# Altium PCB Slit_Lamp_PCB.PcbDoc
Units mm, origin at the board's own origin, x right, y up, seen from the top; angles counter-clockwise.
Board outline 40 x 62 mm, 2 copper layers (Top, Bottom); 23 components, 24 nets, 117 pads, 0 vias.
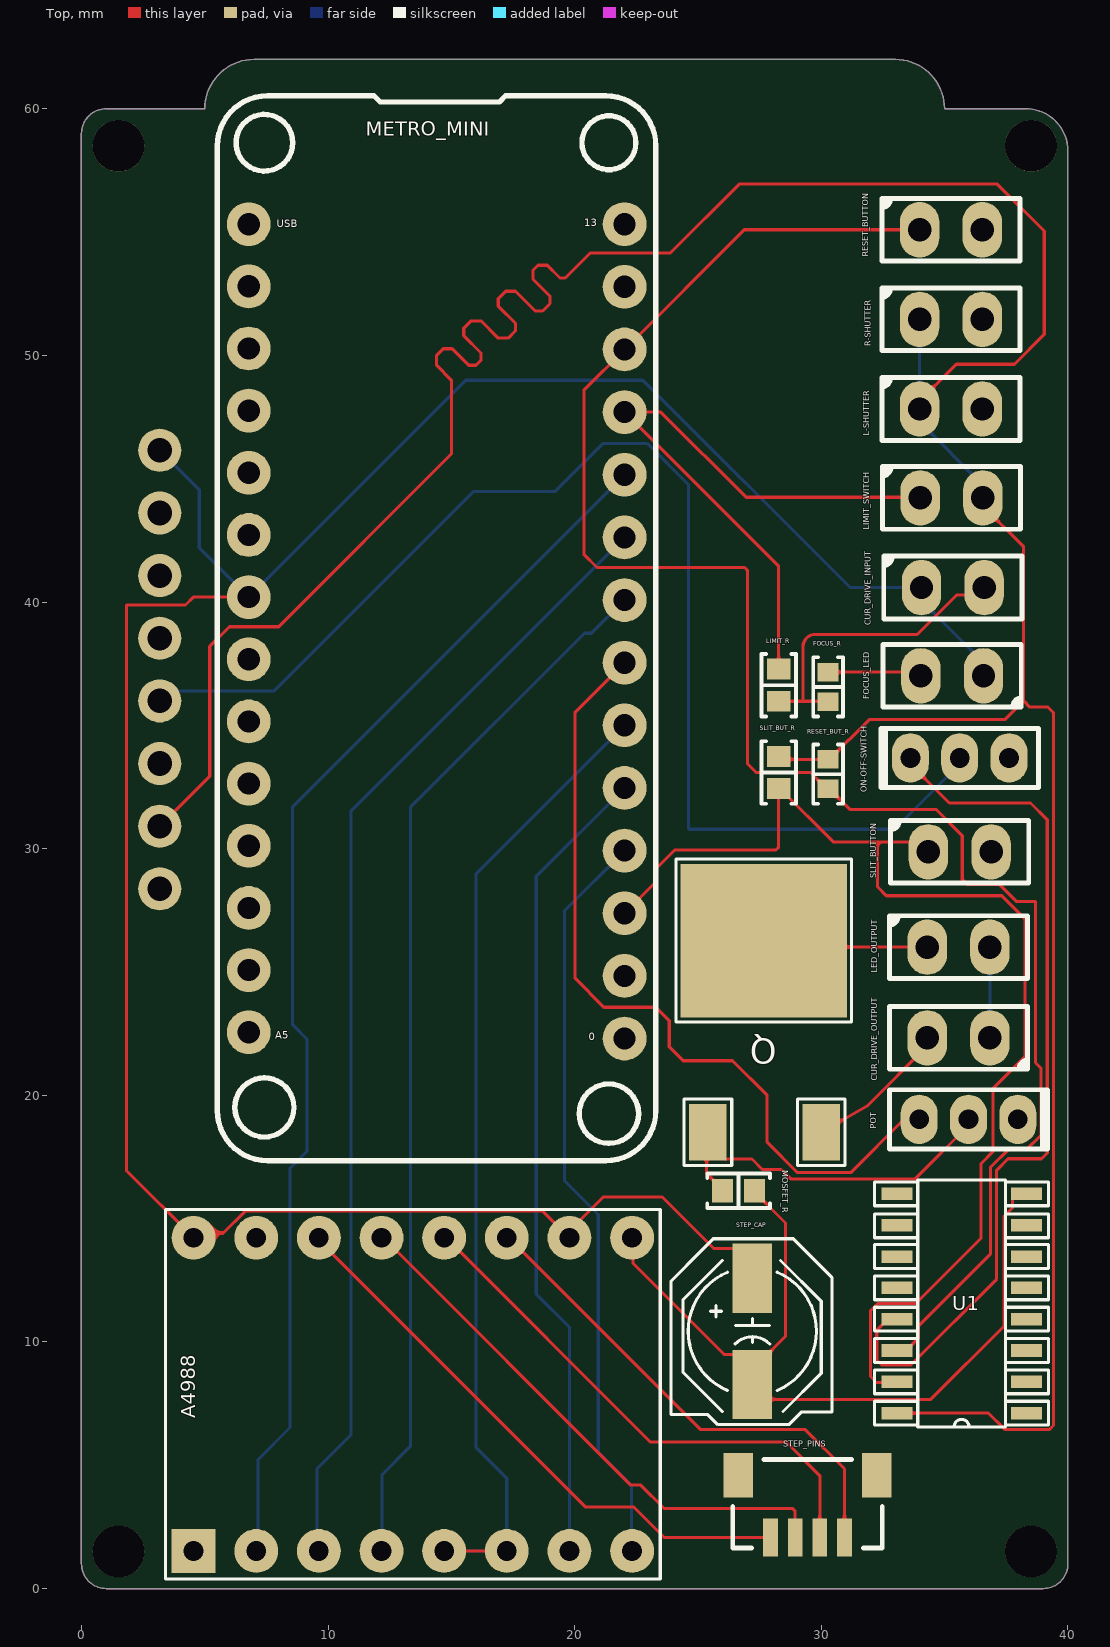
[diagram p0: Top view]
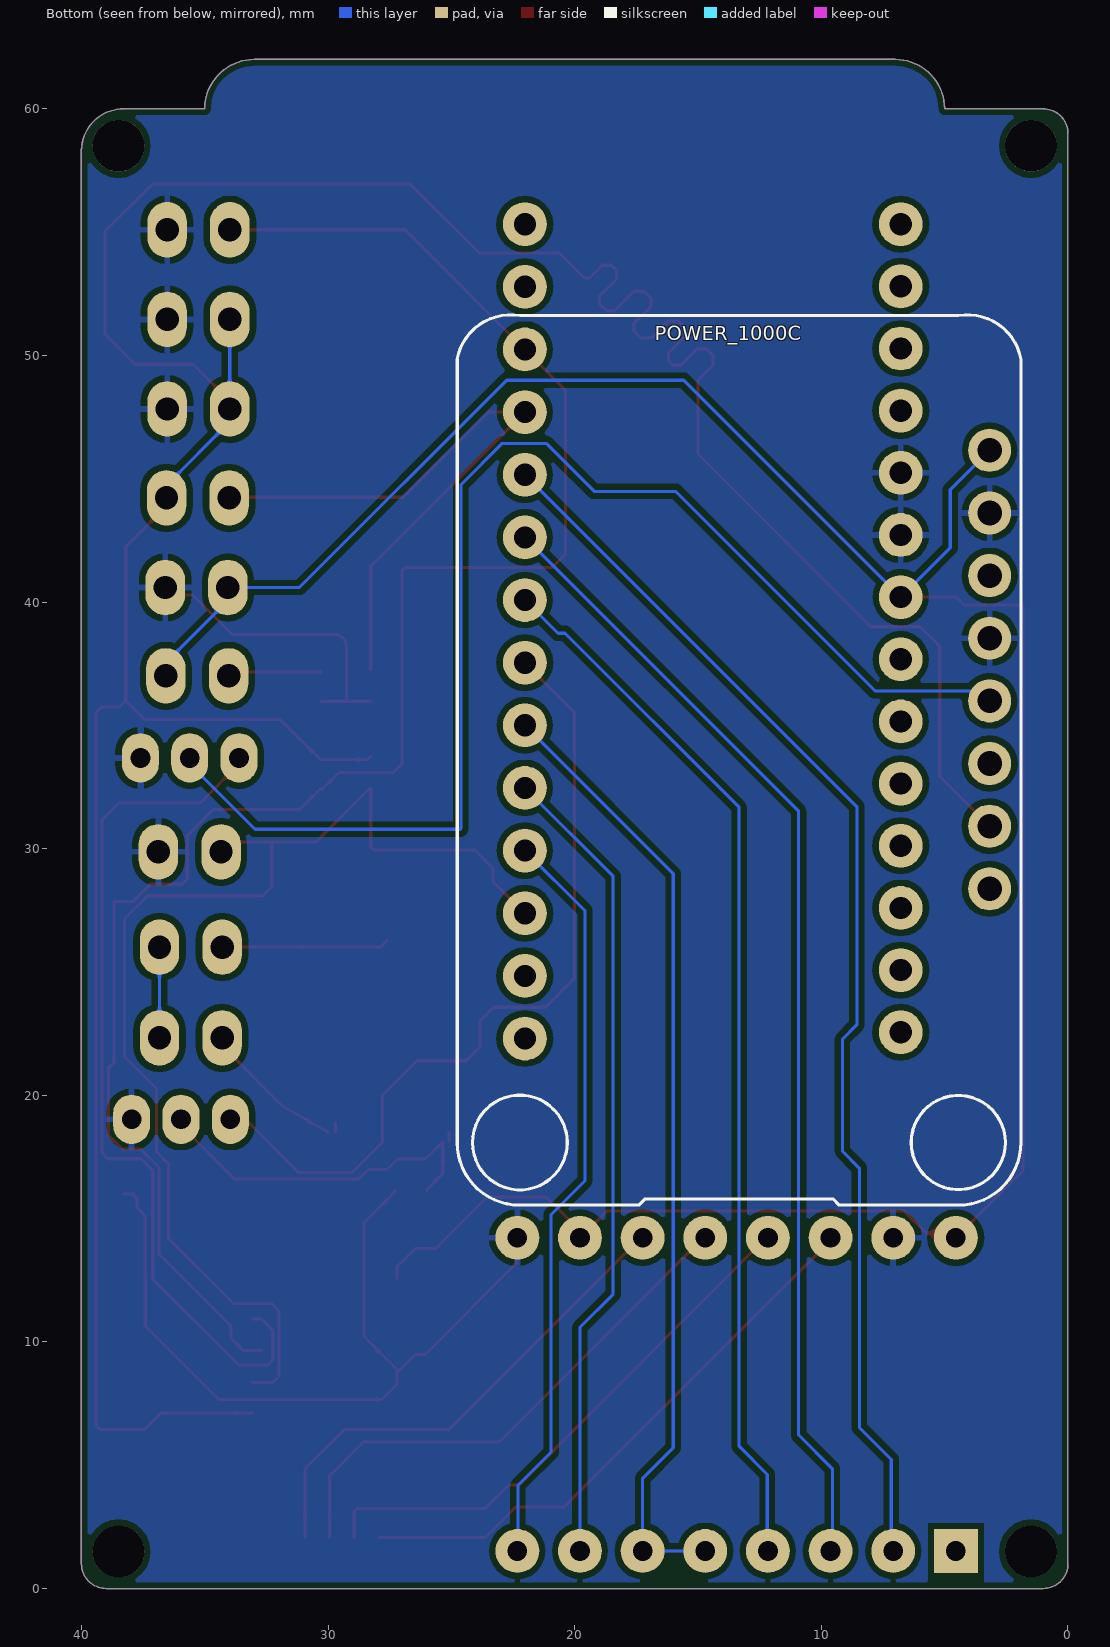
[diagram p1: Bottom view, seen from below]

## Layer stack, top to bottom
Top Solder: solder mask 0.0102, Solder Resist, Dk 3.5
Top: signal copper 0.0356
Dielectric 1: dielectric 0.32, FR-4, Dk 4.5
Bottom: signal copper 0.0356
Bottom Solder: solder mask 0.0102, Solder Resist, Dk 3.5

## Board outline
7,62 ccw(c7,60) 5,60 1,60 ccw(c1,59) 0,59 0,1 ccw(c1,1) 1,0 39,0 ccw(c39,1) 40,1 40,58.293 ccw(c38.293,58.293) 38.293,60 35,60 ccw(c33,60) 33,62

## Design rules (kind name [scope] priority, off if disabled: settings)
BoardOutlineClearance mdCopperDimension [All] p1: gap=0.254 ignorepadtopadclearanceinfootprint=FALSE except(0: Arc-SplitContinuation Track-SplitContinuation SMDPad-SplitContinuation THPad-SplitContinuation Via-SplitContinuation Fill-SplitContinuation Poly-SplitContinuation Region-SplitContinuation Text-SplitContinuation; 0.203: Poly-OutlineEdge Poly-CavityEdge Poly-CutoutEdge Poly-SplitBarrior)
Clearance "Clearance (Same Net)" [All] p1: gap=0.254 ignorepadtopadclearanceinfootprint=FALSE
Clearance [All] p2: gap=0.127 ignorepadtopadclearanceinfootprint=FALSE
HoleSize HoleSize_Pad [IsPad] p1: absolutevalues=TRUE maxlimit=6.35 minlimit=0.7 maxpercent=80.000 minpercent=20.000
HoleSize HoleSize_Via [IsVia] p2: absolutevalues=TRUE maxlimit=6.3 minlimit=0.3 maxpercent=80.000 minpercent=20.000
HoleSize HoleSize_For_NetClass_POWER [InNetClass('POWER')] p3: absolutevalues=TRUE maxlimit=0 minlimit=0 maxpercent=80.000 minpercent=20.000
HoleToHoleClearance Same_Net [InNet(ALL)] p1: gap=0.254 allowstackedmicrovias=TRUE
MinimumAnnularRing MinimumAnnularRing_PTH [InDrillLayerPair('Top - Bottom')] p1: minimumring=0.3
MinimumAnnularRing [All] p2: minimumring=0.13
PasteMaskExpansion mlMinCreamFrame [All] p1: expansion=0
PolygonConnect PolygonConnect_For_PolygonThermal_ON_Width60000_Gap100000 [InPolygonClass('PolygonThermal_ON_Width60000_Gap100000') vs Not IsVia] p1: connectstyle=Relief reliefconductorwidth=0.152 reliefentries=4 polygonreliefangle="90 Angle" airgapwidth=0.254
PolygonConnect PolygonConnect_For_PolygonThermal_ON_Width393700_Gap100000 [InPolygonClass('PolygonThermal_ON_Width393700_Gap100000') vs Not IsVia] p2: connectstyle=Relief reliefconductorwidth=1 reliefentries=4 polygonreliefangle="90 Angle" airgapwidth=0.254
PolygonConnect ThermalVias [IsVia] p3: connectstyle=Direct reliefconductorwidth=0.254 reliefentries=4 polygonreliefangle="90 Angle" airgapwidth=0.254
PolygonConnect [All] p4: connectstyle=Relief reliefconductorwidth=0.254 reliefentries=4 polygonreliefangle="90 Angle" airgapwidth=0.254
RoutingVias [All] p1: holewidth=0.305 width=0.457 viastyle="Through Hole" minholewidth=0.305 minwidth=0.457 maxholewidth=2.54 maxwidth=2.54
SilkToSilkClearance [All] p1: silktosilkclearance=0.127
SilkToSolderMaskClearance [IsPad] p1: minsilkscreentomaskgap=0.05 clearancetoexposedcopper=FALSE
SolderMaskExpansion mlMinStopFrame [All] p1: expansion=0.064
Width Width_For_NetClass_POWER [InNetClass('POWER')] p1: maxlimit=0.254 minlimit=2539.975 preferedwidth=0 toplayer_minwidth=0 bottomlayer_minwidth=0 minimp=50.000000 maximp=50.000000 favimp=50.000000
Width [All] p2: maxlimit=254 minlimit=0.127 preferedwidth=0.127
25 further rules are at their usual default settings.

## Components (designator, comment, footprint, x,y, rotation, side; value= is the part's Value field where it differs from the comment)
A4988 "A4988" A4988 13.437,7.874 r90 top locked
CUR_DRIVE_INPUT "POS-NEG" "SAMTEC SSW-102-03-T-S" 35.331,40.589 r0 top
CUR_DRIVE_OUTPUT "POS-NEG" "SAMTEC SSW-102-03-T-S" 35.566,22.327 r180 top
FOCUS_LED "POS-NEG" "SAMTEC SSW-102-03-T-S" 35.306,37.008 r180 top
FOCUS_R "1M" "RES 0603_1608 RF" 30.277,36.557 r270 top value=1Meg
L-SHUTTER "POS-NEG" "SAMTEC SSW-102-03-T-S" 35.255,47.828 r0 top
LED_OUTPUT "POS-NEG" "SAMTEC SSW-102-03-T-S" 35.566,26.01 r0 top
LIMIT_R "10K" "RES 0603_1608" 28.27,36.627 r270 top value=10k
LIMIT_SWITCH "SIG-VBAT" "SAMTEC SSW-102-03-T-S" 35.281,44.221 r0 top
METRO_MINI "ADAFRUIT_METRO_MINI" ADAFRUIT_METRO_MINI 14.402,38.938 r270 top locked
MOSFET_R "10K" "RES 0603_1608" 26.645,16.129 r180 top value=10k
ON-OFF-SWITCH "Q4-EN-GND" "SULLINS NPPN031BFCN" 35.611,33.68 r0 top
POT "SIG-OUTPUT-GND" "SULLINS NPPN031BFCN" 35.966,19.025 r180 top
POWER_1000C "ADAFRUIT_POWER_BOOST" ADAFRUIT_POWER_BOOST_1000C 12.7,32.118 r90 bottom locked (schematic designator ?)
Q "RFD12N06RLESM9A" "TO-252AA (MOSFET)" 25.4,18.5 r0 top
R-SHUTTER "POS-NEG" "SAMTEC SSW-102-03-T-S" 35.255,51.46 r0 top
RESET_BUT_R "10K" "RES 0603_1608 RF" 30.277,33.02 r90 top value=10k
RESET_BUTTON "SIG-VBAT" "SAMTEC SSW-102-03-T-S" 35.255,55.093 r0 top
SLIT_BUT_R "10K" "RES 0603_1608" 28.27,33.09 r270 top value=10k
SLIT_BUTTON "SIG-VBAT" "SAMTEC SSW-102-03-T-S" 35.611,29.87 r0 top
STEP_CAP "100UF/16V" STEP_CAPACITOR 27.203,10.43 r90 top locked
STEP_PINS "O-Br-Bl-R" "JST BM04B-SRSS-TB" 29.439,3.327 r0 top locked
U1 "SN74LS279ADR" D16-L 35.687,11.557 r180 top locked

## Footprints (in the part's own frame and the unit in brackets; to place one, negate y for a bottom-side part, rotate by r counter-clockwise, add the part's x,y. Pads: shape width x height; smd on the part's side, far side on the other; paste and mask are expansions set on the pad)
A4988 [mil]
  round 70 / inner round 60 / far side round 70 hole 31.5: 1A(250,-50) 1B(250,-150) 2A(250,50) 2B(250,150) DIR(-250,-350) GND(250,250) GND(250,-350) MS1(-250,250) MS2(-250,150) MS3(-250,50) RESET(-250,-50) SLEEP(-250,-150) STEP(-250,-250) VDD(250,-250) VMOT(250,350)
  rect 70x70 / inner rect 60x60 / far side rect 70x70 hole 31.5: ENABLE(-250,350)
  silkscreen extent -295,-395 295,395, body extent -300,-400 300,400, height 394
ADAFRUIT_METRO_MINI [mil]
  round 70 / inner round 60 / far side round 70 hole 35.43: 0(655,300) 1(555,300) 2(455,300) 3(355,300) 3V(-446.54,-300) 4(255,300) 5(155,300) 5V(-347.31,-300) 6(55,300) 7(-45,300) 8(-145,300) 9(-245,300) 10(-345,300) 11(-445,300) 12(-545,300) 13(-645,300) A0(148.84,-300) A1(248.08,-300) A2(347.31,-300) A3(446.54,-300) A4(545.77,-300) A5(645,-300) AREF(49.61,-300) GND(-248.08,-300) GND(-148.85,-300) RST(-545.77,-300) USB(-645,-300) VIN(-49.62,-300)
  silkscreen extent -850,-350 850,350, body extent -856,-347 829,351, height 358
ADAFRUIT_POWER_BOOST_1000C [mm]
  round 1.75 / inner round 1.524 / far side round 1.75 hole 1: 5V(14.034,-9.525) EN(3.873,-9.525) GND(6.413,-9.525) GND(11.493,-9.525) LB0(8.954,-9.525) USB(-3.747,-9.525) VBAT(-1.207,-9.525) VS(1.333,-9.525)
  silkscreen extent -16.57,-10.8 19.53,12.07, body extent -17.08,-10.79 19.55,12.07, height 10.96
D16-L [mil]
  rect 49.5x20 smd: 1(-103.25,175) 2(-103.25,125) 3(-103.25,75) 4(-103.25,25) 5(-103.25,-25) 6(-103.25,-75) 7(-103.25,-125) 8(-103.25,-175) 9(103.25,-175) 10(103.25,-125) 11(103.25,-75) 12(103.25,-25) 13(103.25,25) 14(103.25,75) 15(103.25,125) 16(103.25,175)
  silkscreen extent -139,-197 139,197, body extent -117,-195 120,195, height 55
"JST BM04B-SRSS-TB" [mm] "1.0mm pitch/Disconnectable Crimp style connector"
  rect 0.6x1.55 smd: 1(-1.5,-1.262) 2(-0.5,-1.262) 3(0.5,-1.262) 4(1.5,-1.262)
  rect 1.2x1.8 smd: M(-2.8,1.262) M(2.8,1.262)
  silkscreen extent -3.03,-1.68 3.03,1.91, body extent -3,-1.69 3,1.91, height 4.32
"RES 0603_1608" [mm] "Chip Resistor, 2-Leads, Body 1.60x0.80mm, IPC Medium Density"
  rect 0.85x0.95 smd: 1(-0.65,0) 2(0.65,0)
  silkscreen extent -1.27,-0.7 1.27,0.7, body extent -0.8,-0.4 0.8,0.4, height 0.45
"RES 0603_1608 RF" [mm] "Chip Resistor, 2-Leads, Body 1.60x0.80mm, IPC High Density"
  rect 0.75x0.85 smd: 1(-0.6,0) 2(0.6,0)
  silkscreen extent -1.2,-0.6 1.2,0.6, body extent -0.8,-0.4 0.8,0.4, height 0.45
"SAMTEC SSW-102-03-T-S" [mm]
  oval 1.6x2.25 hole 0.95: 1(-1.27,0) 2(1.27,0)
  silkscreen extent -2.8,-1.27 2.8,1.27, body extent -2.79,-1.21 2.79,1.21, height 8.51
STEP_CAPACITOR [mm]
  rect 2.8x1.6 smd: A(2.15,0) K(-2.15,0)
  silkscreen extent -3.78,-3.23 3.75,3.3, body extent -2.95,-2.65 2.95,2.65, height 5.41
"SULLINS NPPN031BFCN" [mm]
  oval 1.5x2 hole 0.8: 1(-2,0) 2(0,0) 3(2,0)
  silkscreen extent -3.2,-1.2 3.2,1.2, body extent -3.25,-1.2 3.25,1.2, height 4.41
"TO-252AA (MOSFET)" [mm]
  rect 1.524x2.28 smd: 1(0,0) 3(4.6,0)
  rect 6.74x6.23 smd: 2(2.261,7.772)
  silkscreen extent -1.3,-1.35 5.82,11.07, body extent -1.1,-0.18 5.63,9.92, height 2.38

## Part data
CUR_DRIVE_INPUT FOCUS_LED L-SHUTTER LIMIT_SWITCH R-SHUTTER RESET_BUTTON SLIT_BUTTON: library part 1X02_PTH_VERT_FEMALE_2.54MM, "2 Positions Header Connector 0.079\" (2.00mm) Through Hole Tin", MFR="Sullins Connector Solutions", MPN=PPTC021LFBN-RC, Supplier Part Number 1=S7000-ND, DATASHEET=https://drawings-pdf.s3.amazonaws.com/10492.pdf, DeviceName=_PTH_VERT_FEMALE_2.54MM, DeviceSetName=1X02, DIST=Digikey, DISTLINK=https://www.digikey.com/products/en?keywords=PPTC021LFBN-RC, DISTPN=S7000-ND, GateName_1=G$1, LibraryName=PiB_connectors, Supplier 1=Digi-Key, SymbolName_1=1X02
CUR_DRIVE_OUTPUT LED_OUTPUT: library part 1X02_PTH_VERT_FEMALE_2.54MM, "2 Positions Header Connector 0.079\" (2.00mm) Through Hole Tin", MFR="Sullins Connector Solutions", MPN=PPTC021LFBN-RC, DATASHEET=https://drawings-pdf.s3.amazonaws.com/10492.pdf, DeviceName=_PTH_VERT_FEMALE_2.54MM, DeviceSetName=1X02, DIST=Digikey, DISTLINK=https://www.digikey.com/products/en?keywords=PPTC021LFBN-RC, DISTPN=S7000-ND, GateName_1=G$1, LibraryName=PiB_connectors, SymbolName_1=1X02
FOCUS_R: library part RESISTOR_PTH-0207/7_1/8W-5%, Supplier Part Number 1=P1.00MHCT-ND, CREATOR=MrSwirlyEyes, DeviceName=_PTH-0207/7_1/8W-5%, DeviceSetName=RESISTOR, GateName_1=G$1, LibraryName=PiB_resistors, Supplier 1=Digi-Key, SymbolName_1=RESISTOR, TESTED=YES
LIMIT_R RESET_BUT_R SLIT_BUT_R: library part 10KO_SMD-0603_1/10W-5%, MFR=Yageo, MPN=RC0603JR-0710KL, Supplier Part Number 1=541-10.0KHCT-ND, DATASHEET=http://www.yageo.com/documents/recent/PYu-RC_Group_51_RoHS_L_9.pdf, DeviceName=_SMD-0603_1/10W-5%, DeviceSetName=10KO, DIST=Digikey, DISTLINK=https://www.digikey.com/products/en?keywords=311-10KGRCT-ND, DISTPN=311-10KGRCT-ND, GateName_1=G$1, LibraryName=PiB_resistors, Supplier 1=Digi-Key, SymbolName_1=RESISTOR
MOSFET_R: library part 10KO_SMD-0603_1/10W-5%, MFR=Yageo, MPN=RC0603JR-0710KL, Supplier Part Number 1=603-RC0603JR-0710KL, DATASHEET=http://www.yageo.com/documents/recent/PYu-RC_Group_51_RoHS_L_9.pdf, DeviceName=_SMD-0603_1/10W-5%, DeviceSetName=10KO, DIST=Digikey, DISTLINK=https://www.digikey.com/products/en?keywords=311-10KGRCT-ND, DISTPN=311-10KGRCT-ND, GateName_1=G$1, LibraryName=PiB_resistors, Supplier 1=Mouser, Supplier 2=Digi-Key, Supplier Part Number 2=541-10.0KHCT-ND, SymbolName_1=RESISTOR
ON-OFF-SWITCH: library part 1X03_PTH_VERT_FEMALE_2.54MM, Color=Black, Manufacturer 1=Sullins, Manufacturer Part Number 1=PPTC031LFBN-RC, MFR="Sullins Connector Solutions", Package Quantity=1000, Supplier Part Number 1=S7001-ND, ComponentLink1Description=https://media.digikey.com/pdf/Data%20Sheets/Sullins%20PDFs/Female_Headers.100_DS.pdf?src-supplier=Digi-Key, ComponentLink1URL=https://media.digikey.com/pdf/Data%20Sheets/Sullins%20PDFs/Female_Headers.100_DS.pdf?src-supplier=Digi-Key, ComponentLink2Description=http://www.sullinscorp.com/catalogs/78_Page80-81_HEADER_.100_2.54mm_FEMALE.pdf?src-supplier=Future+Electronics, ComponentLink2URL=http://www.sullinscorp.com/catalogs/78_Page80-81_HEADER_.100_2.54mm_FEMALE.pdf?src-supplier=Future+Electronics, Connector Type=Header,Socket, Contact Material=Bronze, Contact Plating=Tin, DATASHEET=https://drawings-pdf.s3.amazonaws.com/10492.pdf, DeviceName=_PTH_VERT_FEMALE_2.54MM, DeviceSetName=1X03, DIST=Digikey, DISTLINK=https://www.digikey.com/products/en?keywords=PPTC031LFBN-RC, DISTPN=S7001-ND, GateName_1=G$1, Height=8.5mm, Housing Material=Plastic, Lead Free="Lead Free", Length=8.12mm, LibraryName=PiB_connectors, Mount="Through Hole", MPN=PPTC031LFBN-RC, Number of Positions=3, Number of Rows=1, Packaging=Bulk, Pitch=0.1inch, Pricing 1="1=0.42000, 10=0.40000, 100=0.28000, 500=0.24004, 1000=0.20003, 5000=0.17145, 10000=0.16510 (USD)", RoHS=Yes, Stock 1=31703, Supplier 1=Digi-Key, SymbolName_1=1X03, Termination=Solder, Width=2.5mm
POT: library part 1X03_PTH_VERT_FEMALE_2.54MM, MFR="Sullins Connector Solutions", MPN=PPTC031LFBN-RC, Supplier Part Number 1=S7001-ND, DATASHEET=https://drawings-pdf.s3.amazonaws.com/10492.pdf, DeviceName=_PTH_VERT_FEMALE_2.54MM, DeviceSetName=1X03, DIST=Digikey, DISTLINK=https://www.digikey.com/products/en?keywords=PPTC031LFBN-RC, DISTPN=S7001-ND, GateName_1=G$1, LibraryName=PiB_connectors, Supplier 1=Digi-Key, SymbolName_1=1X03
POWER_1000C: Package=ADAFRUIT_POWER_BOOST_1000C, DeviceSetName=ADAFRUIT_POWER_BOOST, GateName_1=G$1, LibraryName=adafruit_power_1000c, SymbolName_1=ADAFRUIT_POWER_BOOST
Q: library part "N-Channel MOSFET", Supplier Part Number 1=RFD12N06RLESM9ACT-ND, Supplier 1=Digi-Key
STEP_CAP: library part 100UF-POLARIZED_SMD_16V-20%_L6.6-W6.6, Capacitance=100uF, Case/Package=Radial, Dielectric Material=Aluminium, ESR (Equivalent Series Resistance)=360mR, Leakage Current=3uA, Manufacturer 3=Panasonic, Manufacturer Part Number 3=EEEFK1C101P, Max Operating Temperature=105°C, MFR="Panasonic Electronic Components", Min Operating Temperature=-55°C, MPN=EEE-FK1C101P, Package Quantity=1000, Ripple Current=240mA, Tolerance=20%, Voltage=16V, +=+, ComponentLink1Description=https://datasheet.ciiva.com/19479/1357482-19479360.pdf?src-supplier=Jameco, ComponentLink1URL=https://datasheet.ciiva.com/19479/1357482-19479360.pdf?src-supplier=Jameco, ComponentLink2Description=https://datasheet.ciiva.com/11777/0900766b80e4e8b0-11777237.pdf?src-supplier=RSComponents, ComponentLink2URL=https://datasheet.ciiva.com/11777/0900766b80e4e8b0-11777237.pdf?src-supplier=RSComponents, ComponentLink3Description=https://datasheet.ciiva.com/29313/443464-da-01-en-smd-elko-vfk-d-100-uf-16v-29313488.pdf?src-supplier=Conrad, ComponentLink3URL=https://datasheet.ciiva.com/29313/443464-da-01-en-smd-elko-vfk-d-100-uf-16v-29313488.pdf?src-supplier=Conrad, ComponentLink4Description=https://datasheet.ciiva.com/2983/aba0000ce120-2983939.pdf?src-supplier=Avnet, ComponentLink4URL=https://datasheet.ciiva.com/2983/aba0000ce120-2983939.pdf?src-supplier=Avnet, ComponentLink5Description=https://datasheet.ciiva.com/43463/58258-43463495.pdf?src-supplier=Farnell, ComponentLink5URL=https://datasheet.ciiva.com/43463/58258-43463495.pdf?src-supplier=Farnell, ComponentLink6Description=https://datasheet.ciiva.com/46376/1676921-46376425.pdf?src-supplier=Element14, ComponentLink6URL=https://datasheet.ciiva.com/46376/1676921-46376425.pdf?src-supplier=Element14, ComponentLink7Description=https://datasheet.ciiva.com/24022/aba0000ce120-24022554.pdf?src-supplier=Mouser, ComponentLink7URL=https://datasheet.ciiva.com/24022/aba0000ce120-24022554.pdf?src-supplier=Mouser, ComponentLink8Description=https://datasheet.ciiva.com/16539/aba0000ce120-16539980.pdf?src-supplier=Avnet+Asia, ComponentLink8URL=https://datasheet.ciiva.com/16539/aba0000ce120-16539980.pdf?src-supplier=Avnet+Asia, ComponentLink9Description=https://datasheet.ciiva.com/25899/aba0000ce120-25899324.pdf?src-supplier=Avnet+Europe, ComponentLink9URL=https://datasheet.ciiva.com/25899/aba0000ce120-25899324.pdf?src-supplier=Avnet+Europe, ComponentLink10Description=https://datasheet.ciiva.com/30177/aba0000ce120-30177788.pdf?src-supplier=Onlinecomponents.com, ComponentLink10URL=https://datasheet.ciiva.com/30177/aba0000ce120-30177788.pdf?src-supplier=Onlinecomponents.com, ComponentLink11Description=https://datasheet.ciiva.com/14601/70255214-14601005.pdf?src-supplier=Allied+Electronics, ComponentLink11URL=https://datasheet.ciiva.com/14601/70255214-14601005.pdf?src-supplier=Allied+Electronics, ComponentLink12Description=https://datasheet.ciiva.com/16449/aba0000ce120-16449534.pdf?src-supplier=Future+Electronics, ComponentLink12URL=https://datasheet.ciiva.com/16449/aba0000ce120-16449534.pdf?src-supplier=Future+Electronics, ComponentLink13Description=https://datasheet.ciiva.com/46387/1676921-46387918.pdf?src-supplier=Element14, ComponentLink13URL=https://datasheet.ciiva.com/46387/1676921-46387918.pdf?src-supplier=Element14, CREATOR=MrSwirlyEyes, DATASHEET=http://industrial.panasonic.com/www-cgi/jvcr13pz.cgi?E+PZ+3+ABA0120+EEEFK1C101P+7+WW, DeviceName=_SMD_16V-20%_L6.6-W6.6, DeviceSetName=100UF-POLARIZED, Diameter=6.3mm, DIST=Digikey, DISTLINK=https://www.digikey.com/products/en?keywords=PCE3783CT-ND, DISTPN=PCE3783CT-ND, GateName_1=G$1, Height=5.8mm, Height - Seated (Max)=0.24inch, Impedance=360mR, Length=5.8mm, LibraryName=PiB_capacitors, Life (Hours)=2000Hour, Material=Aluminium, Mount="Surface Mount,PCB", Number of Pins=2, Packaging="Tape and Reel", Polarity=Polar, Pricing 3="1=0.49000, 10=0.33700, 100=0.20220, 500=0.15162 (USD)", Radiation Hardening=No, REACH SVHC="No SVHC", Ripple Current (AC)=240mA, RoHS=Yes, Stock 3=98945, Supplier 1=Digi-Key, Supplier 2=Digi-Key, Supplier 3=Digi-Key, Supplier Part Number 3=PCE3783CT-ND, SymbolName_1=CAPACITOR_POLARIZED, Termination=SMD/SMT, TESTED=NO, Voltage Rating=16V, Voltage Rating (DC)=16V
STEP_PINS: library part BM04B-SRSS-TB, "JST SH series header 1.00mm pitch disconnectable crimp style connectors, vertical (side entry type), 4 pins", Color=Natural, Contact Resistance=40mR, Current Rating=1A, Flammability Rating="UL94 V-0", Housing Color=Beige, Insulation Resistance=100MR, Manufacturer 1=JST, Manufacturer Part Number 1=BM04B-SRSS-TB(LF)(SN), Max Operating Temperature=85°C, Max Voltage Rating (AC)=50V, Min Operating Temperature=-25°C, Supplier Part Number 1=455-1790-1-ND, ComponentLink1Description=https://datasheet.ciiva.com/26894/getdatasheetpartid-690899-26894827.pdf?src-supplier=Verical, ComponentLink1URL=https://datasheet.ciiva.com/26894/getdatasheetpartid-690899-26894827.pdf?src-supplier=Verical, ComponentLink2Description=https://datasheet.ciiva.com/26924/getdatasheetpartid-708793-26924043.pdf?src-supplier=Verical, ComponentLink2URL=https://datasheet.ciiva.com/26924/getdatasheetpartid-708793-26924043.pdf?src-supplier=Verical, ComponentLink3Description=https://datasheet.ciiva.com/16211/esr-16211085.pdf?src-supplier=Future+Electronics, ComponentLink3URL=https://datasheet.ciiva.com/16211/esr-16211085.pdf?src-supplier=Future+Electronics, Connector Type="Male Pin", Contact Material="Copper Alloy", Contact Plating=Tin,Lead,Copper, Depth=2.9mm, DeviceName=-TB, DeviceSetName=BM04B-SRSS, GateName_1=G$1, Gender=Male, Housing Material=Polyamide, Lead Free="Lead Free", Lead Pitch=1mm, Length=6mm, LibraryName="con-JST SH", Material=Polyamide, Max Current Rating=1A, Max Voltage Rating (DC)=50V, Mount="Surface Mount", Number of Contacts=4, Number of Positions=4, Number of Rows=1, Orientation=Straight, Packaging="Tape and Reel", Pitch=0.039inch, Pricing 1="1=0.630000, 10=0.592000, 100=0.454000, 500=0.394800 (USD)", REACH SVHC="No SVHC", RoHS=Yes, Stock 1=5100, Supplier 1=Digi-Key, SymbolName_1=M_1R04, Termination=Solder, Voltage Rating (AC)=50V
U1: "SR Latch", MANUFACTURER="Texas Instruments", Supplier Part Number 1=296-29449-1-ND, BUILT_BY=EMA_UL_Team, DeviceSetName=SN74LS279ADR, GateName_1=A, LibraryName=SRlatch, MANUFACTURER_PART_NUMBER=SN74LS279ADR, Supplier 1=Digi-Key, SymbolName_1=SN74LS279A_D_16, VENDOR=Vendor
A4988: DeviceSetName=A4988, GateName_1=G$1, LibraryName=a4988_stepDriver, Package=A4988, SymbolName_1=A4988
METRO_MINI: DeviceSetName=ADAFRUIT_METRO_MINI, GateName_1=G$1, LibraryName=adafruit_metro_mini, Package=ADAFRUIT_METRO_MINI, SymbolName_1=ADAFRUIT_METRO_MINI

## Free pads (board coordinates)
  round 2.1 hole 2.1 unplated: MH1(38.5,58.5) MH2(1.5,58.5) MH3(1.5,1.5) MH4(38.5,1.5)

## Nets (pads, with @x,y where several pads share a name; then routed paths per layer and width w, separated by ;. In a path a pad name is that pad's centre, name@x,y a point inside that pad or via, vN(x,y) a via of type N, cw(c..) or ccw(c..) an arc to the next point about the centre after c; other vN are vias at no path point)
5V: A4988.VDD A4988.VMOT CUR_DRIVE_INPUT.1 FOCUS_LED.1 METRO_MINI.VIN POWER_1000C.5V STEP_CAP.A | length 105.3
  Top w0.127: METRO_MINI.VIN 4.537,40.199 4.216,39.878 1.829,39.878 1.829,16.942 A4988.VMOT 4.74,14.417 5.753,14.417 6.639,15.303 18.707,15.303 A4988.VDD ; A4988.VDD@19.685,14.402 21.158,15.875 23.546,15.875 25.631,13.79 26.467,13.79 27.203,13.053 STEP_CAP.A ; CUR_DRIVE_INPUT.1@34.061,40.056 CUR_DRIVE_INPUT.1 ; FOCUS_LED.1 FOCUS_LED.1@36.576,37.541
  Bottom w0.127: POWER_1000C.5V 4.775,44.552 4.775,42.205 METRO_MINI.VIN 15.577,48.994 22.761,48.994 31.166,40.589 CUR_DRIVE_INPUT.1 34.061,40.056 36.576,37.541 FOCUS_LED.1
GND: A4988.GND CUR_DRIVE_INPUT.2 FOCUS_R.2 L-SHUTTER.2 LIMIT_R.2 METRO_MINI.GND MOSFET_R.1 ON-OFF-SWITCH.3 POT.1 POWER_1000C.GND R-SHUTTER.2 RESET_BUTTON.2 SLIT_BUTTON.2 STEP_CAP.K U1.8 | length 47.2
  Top w0.127: A4988.GND@22.225,14.402 22.365,14.262 22.365,13.183 26.057,9.49 26.467,9.49 STEP_CAP.K@27.203,8.753 ; MOSFET_R.1 27.295,16.079 28.55,14.824 28.55,10.227 27.203,8.88 STEP_CAP.K@27.203,8.753 ; LIMIT_R.2 29.264,35.977 ; FOCUS_R.2 30.257,35.977 29.264,35.977 ; CUR_DRIVE_INPUT.2 36.298,40.286 35.484,40.286 33.882,38.684 29.743,38.684 ccw(c29.743,38.202) 29.261,38.202 29.261,35.98 29.264,35.977 ; U1.8 37.935,16.002 37.744,15.811 37.744,15.43 37.414,15.1 37.414,10.643 34.442,7.671 27.813,7.671 STEP_CAP.K STEP_CAP.K@27.203,8.753
MOS_D: LED_OUTPUT.1 Q.2 | length 6.8
  Top w0.127: Q.2@27.61,26.264 27.864,26.01 LED_OUTPUT.1
MOS_S: CUR_DRIVE_OUTPUT.2 Q.3 | length 6.8
  Top w0.127: Q.3@29.7,18.5 Q.3@29.7,18.878 ; Q.3 31.871,19.577 34.296,22.002 CUR_DRIVE_OUTPUT.2 CUR_DRIVE_OUTPUT.2@33.827,22.327
NetA4988_1A: A4988.1A STEP_PINS.3 | length 21.7
  Top w0.127: A4988.1A@14.745,14.262 23.063,5.944 28.575,5.944 29.939,4.58 STEP_PINS.3
NetA4988_1B: A4988.1B STEP_PINS.4 | length 20.3
  Top w0.127: A4988.1B@17.285,14.262 25.104,6.442 29.346,6.442 30.939,4.85 STEP_PINS.4
NetA4988_2A: A4988.2A STEP_PINS.2 | length 22.4
  Top w0.127: A4988.2A@12.205,14.262 22.276,4.191 22.682,4.191 23.622,3.251 28.827,3.251 28.939,3.14 STEP_PINS.2
NetA4988_2B: A4988.2B STEP_PINS.1 | length 23.6
  Top w0.127: A4988.2B@9.906,14.529 9.906,13.843 20.447,3.302 22.403,3.302 23.64,2.065 STEP_PINS.1
NetA4988_DIR: A4988.DIR METRO_MINI.3 | length 30.5
  Bottom w0.127: METRO_MINI.3 19.583,27.483 19.583,16.535 20.955,15.164 20.955,5.537 22.301,4.191 22.301,1.549 A4988.DIR
NetA4988_MS1: A4988.MS1 METRO_MINI.9 | length 50.3
  Bottom w0.127: A4988.MS1 7.163,1.6 7.163,5.232 8.458,6.528 8.458,17.043 9.144,17.729 9.144,22.276 8.56,22.86 8.56,31.699 METRO_MINI.9
NetA4988_MS2: A4988.MS2 METRO_MINI.8 | length 46.3
  Bottom w0.127: A4988.MS2 9.55,1.6 9.55,4.851 10.922,6.223 10.922,31.521 METRO_MINI.8
NetA4988_MS3: A4988.MS3 METRO_MINI.7 | length 42.8
  Bottom w0.127: A4988.MS3 12.192,1.549 12.192,4.623 13.335,5.766 13.335,31.674 20.396,38.735 20.676,38.735 METRO_MINI.7
NetA4988_RESET: A4988.RESET A4988.SLEEP METRO_MINI.5 | length 41.6
  Top w0.127: A4988.RESET A4988.SLEEP
  Bottom w0.127: A4988.RESET A4988.SLEEP 17.247,4.47 16.002,5.715 16.002,28.981 METRO_MINI.5
NetA4988_STEP: A4988.STEP METRO_MINI.4 | length 33
  Bottom w0.127: A4988.STEP 19.787,10.592 18.44,11.938 18.44,28.88 METRO_MINI.4
NetCUR_DRIVE_OUTPUT_1: CUR_DRIVE_OUTPUT.1 LED_OUTPUT.2 | length 3.7
  Bottom w0.127: CUR_DRIVE_OUTPUT.1 LED_OUTPUT.2
NetFOCUS_LED_2: FOCUS_LED.2 FOCUS_R.1 | length 3.8
  Top w0.127: FOCUS_R.1 33.887,37.157 FOCUS_LED.2
NetLIMIT_R_1: LIMIT_R.1 LIMIT_SWITCH.1 METRO_MINI.10 | length 27.3
  Top w0.127: LIMIT_R.1 28.27,41.453 METRO_MINI.10 23.495,47.701 26.949,44.247 33.711,44.247 34.011,44.546 LIMIT_SWITCH.1 LIMIT_SWITCH.1@34.011,43.76
NetMETRO_MINI_2: METRO_MINI.2 SLIT_BUT_R.2 SLIT_BUTTON.1 U1.15 | length 49.1
  Top w0.127: METRO_MINI.2 23.317,28.677 23.317,29.21 24.054,29.947 28.159,29.947 28.27,30.058 SLIT_BUT_R.2 28.32,32.44 30.483,30.277 32.284,30.277 ; U1.15 33.039,8.357 32.233,8.357 31.991,8.598 31.991,11.265 32.283,11.557 33.833,11.557 36.474,14.199 36.474,17.23 36.957,17.713 36.957,20.269 38.252,21.565 38.252,27.153 37.313,28.092 32.639,28.092 32.284,28.447 32.284,30.277 ; SLIT_BUTTON.1@34.341,30.195 SLIT_BUTTON.1 33.934,30.277 32.284,30.277
NetMETRO_MINI_6: METRO_MINI.6 POT.3 | length 33.5
  Top w0.127: METRO_MINI.6 20.015,35.535 20.015,24.74 21.184,23.571 23.292,23.571 23.835,23.028 23.835,21.965 24.4,21.4 26.4,21.4 27.8,20 27.8,18.1 29.034,16.866 31.191,16.866 33.35,19.025 POT.3
NetMETRO_MINI_11: METRO_MINI.11 RESET_BUT_R.1 RESET_BUTTON.1 U1.14 | length 74.5
  Top w0.127: U1.14@32.69,9.652 U1.14 33.439,9.652 33.934,10.147 33.934,10.64 36.855,13.561 36.855,17.072 37.597,17.814 38.336,17.814 38.907,18.385 38.907,21.1 38.684,21.322 38.684,27.864 37.9,27.864 37.209,28.555 35.91,28.555 35.712,28.753 35.712,30.531 34.652,31.591 31.155,31.591 30.327,32.42 RESET_BUT_R.1 30.227,32.42 29.558,33.089 27.363,33.089 27,33.452 27,41.29 26.889,41.402 20.904,41.402 20.371,41.935 20.371,48.59 METRO_MINI.11 26.873,55.093 RESET_BUTTON.1
NetMOSFET_R_2: MOSFET_R.2 POT.2 Q.1 | length 15
  Top w0.127: Q.1@25.1,18.122 Q.1@25.1,18.5 ; MOSFET_R.2 25.995,16.179 25.349,16.824 25.349,18.113 26.048,17.415 27.188,17.415 27.61,16.993 28.372,16.993 28.753,16.612 33.803,16.612 35.966,18.775 POT.2
NetON-OFF-SWITCH_1: ON-OFF-SWITCH.1 U1.13 | length 35.6
  Top w0.127: U1.13 32.69,10.922 32.245,10.477 32.245,9.266 32.446,9.065 33.63,9.065 37.109,12.545 37.109,16.967 37.567,17.424 38.928,17.424 39.161,17.657 39.161,31.172 38.481,31.852 35.19,31.852 33.611,33.43 ON-OFF-SWITCH.1
NetON-OFF-SWITCH_2: ON-OFF-SWITCH.2 POWER_1000C.EN | length 52.8
  Bottom w0.127: POWER_1000C.EN 3.581,36.398 7.823,36.398 15.913,44.488 19.215,44.488 21.158,46.431 22.936,46.431 24.613,44.755 24.613,30.81 24.638,30.785 32.965,30.785 35.611,33.43 ON-OFF-SWITCH.2
VBAT: L-SHUTTER.1 LIMIT_SWITCH.2 POWER_1000C.VBAT R-SHUTTER.1 RESET_BUT_R.2 SLIT_BUT_R.1 U1.16 | length 137.4
  Top w0.127: POWER_1000C.VBAT 5.2,32.937 5.2,38.2 6,39 8,39 15,46 15,49 14.4,49.6 14.4,50 14.671,50.271 15.029,50.271 15.7,49.6 16,49.6 16.2,49.8 16.2,50.1 15.5,50.8 15.5,51.1 15.8,51.4 16.2,51.4 16.9,50.7 17.3,50.7 17.6,51 17.6,51.3 16.9,52 16.9,52.3 17.2,52.6 17.6,52.6 18.4,51.8 18.7,51.8 19,52.1 19,52.4 18.307,53.093 18.307,53.451 18.512,53.655 18.888,53.655 19.403,53.14 19.612,53.14 20.625,54.153 23.876,54.153 26.67,56.947 37.135,56.947 39.04,55.042 39.04,50.851 37.832,49.643 35.475,49.643 33.985,48.153 L-SHUTTER.1 ; SLIT_BUT_R.1 28.39,33.62 RESET_BUT_R.2 30.327,33.62 31.937,35.23 37.44,35.23 38.202,35.992 ; U1.16 36.779,7.112 37.44,6.452 39.258,6.452 39.415,6.608 39.415,35.515 39.192,35.738 38.456,35.738 38.202,35.992 ; LIMIT_SWITCH.2 36.551,43.896 38.202,42.245 38.202,35.992
  Bottom w0.127: R-SHUTTER.1 L-SHUTTER.1 33.985,47.307 36.551,44.742 LIMIT_SWITCH.2 LIMIT_SWITCH.2@36.551,43.896
pads on no net: A4988.ENABLE METRO_MINI.0 METRO_MINI.1 METRO_MINI.3V METRO_MINI.5V METRO_MINI.12 METRO_MINI.13 METRO_MINI.A0 METRO_MINI.A1 METRO_MINI.A2 METRO_MINI.A3 METRO_MINI.A4 METRO_MINI.A5 METRO_MINI.AREF METRO_MINI.RST METRO_MINI.USB POWER_1000C.LB0 POWER_1000C.USB POWER_1000C.VS STEP_PINS.M U1.1 U1.2 U1.3 U1.4 U1.5 U1.6 U1.7 U1.9 U1.10 U1.11 U1.12

## Polygon pours and split planes (outlines as drawn)
GND on Bottom "Bottom-GND" (solid, pour order 18): 0,0 0,62.789 40.234,62.789 43.129,59.893 43.129,0
no net on Bottom "Bottom-No Net" (solid, pour order 0): 39.776,61.874

## Keep-outs
Keep-Out Layer:
  the board outline again, w0

## Silkscreen, mask and mechanical layers (free items; w line width, h text height)
Top Overlay:
  text "13" at 20.396,55.143 h0.5
  text "USB" at 7.925,55.093 h0.5
  text "A5" at 7.849,22.2 h0.5
  text "0" at 20.574,22.123 h0.5
Dimension:
  the board outline again, w0